# Altium PCB Плата.PcbDoc
Units mm, origin at the board's own origin, x right, y up, seen from the top; angles counter-clockwise.
Board outline 70 x 20 mm, 2 copper layers (Top Layer, Bottom Layer); 10 components, 8 nets, 86 pads, 24 vias.
Unrouted connection lines stored in the file: 8.
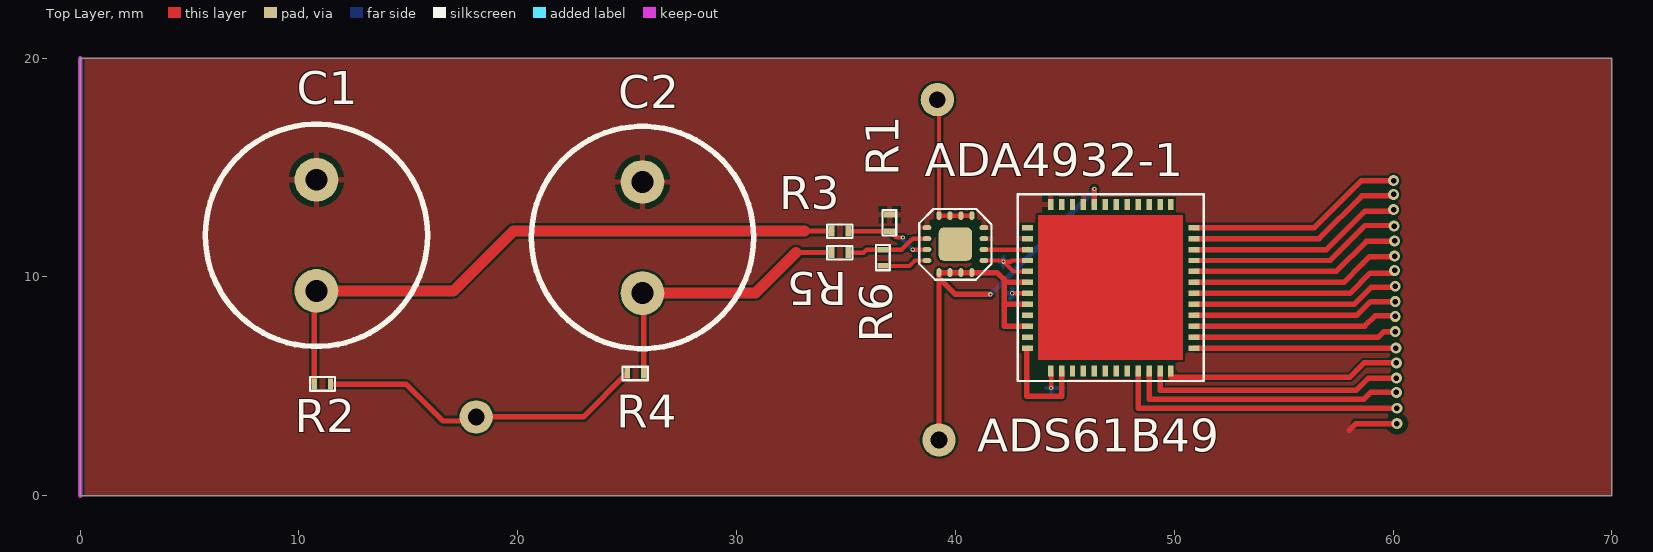
[diagram p0: Top Layer view]
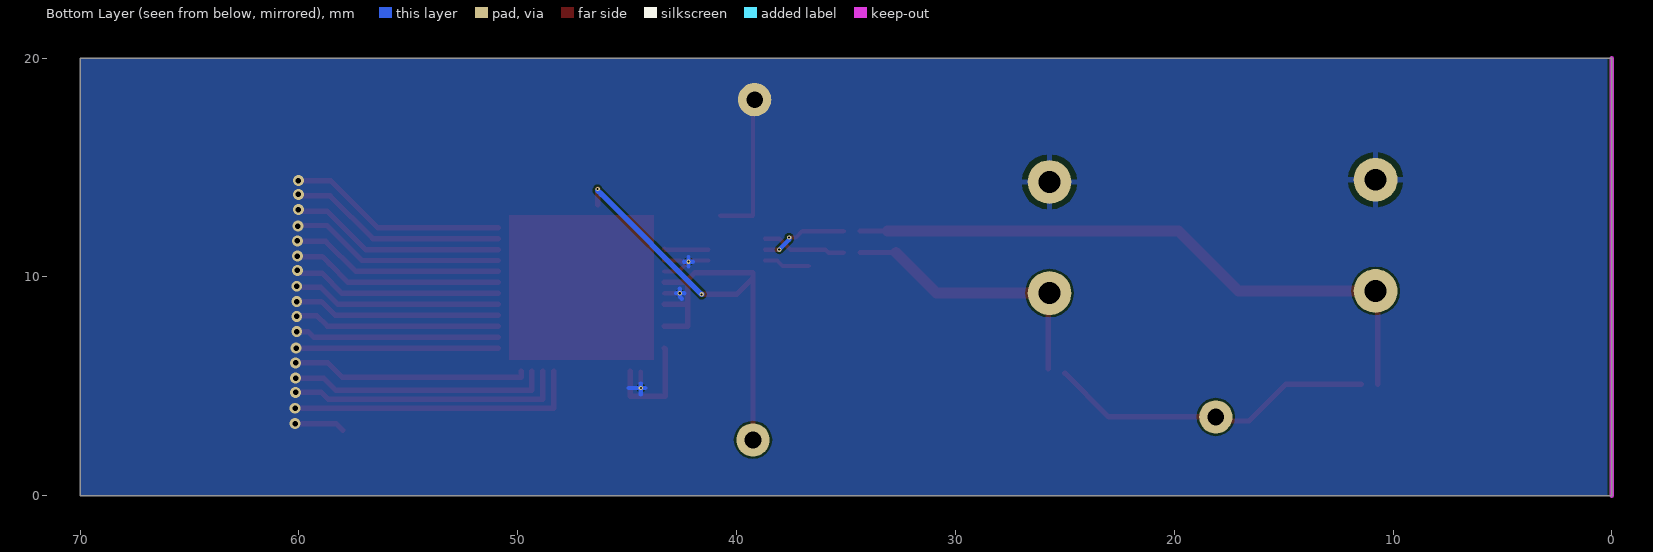
[diagram p1: Bottom Layer view, seen from below]
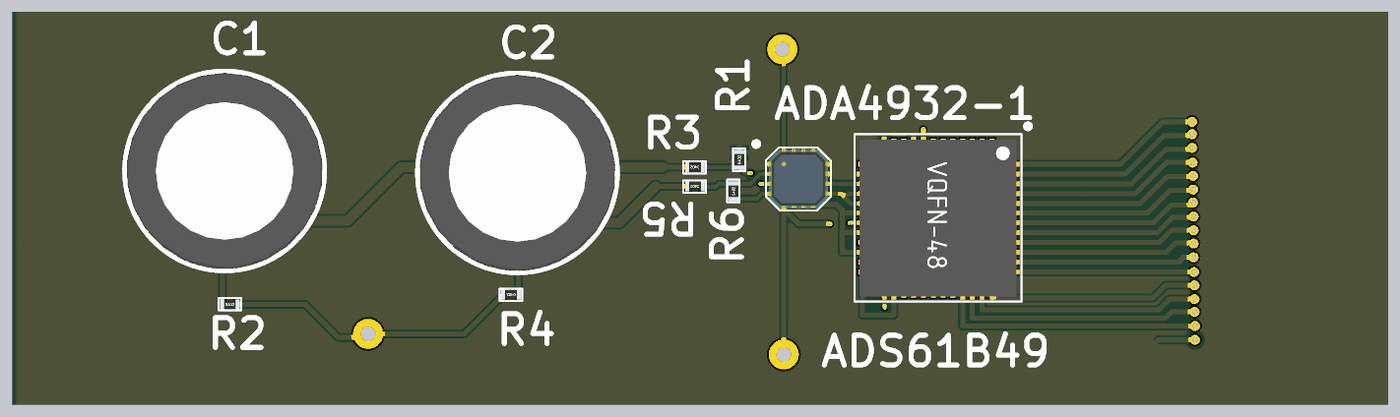
[diagram p2: 3D render of the assembled board from above, using the file's embedded part models]

## Layer stack, top to bottom
Top Solder: solder mask 0.0102, Solder Resist, Dk 3.5
Top Layer: signal copper 0.0356
Dielectric 1: dielectric 0.32, FR-4, Dk 4.8
Bottom Layer: signal copper 0.0356
Bottom Solder: solder mask 0.0102, Solder Resist, Dk 3.5

## Board outline
0,0 0,20 70,20 70,0

## Design rules (kind name [scope] priority, off if disabled: settings)
Clearance Clearance_1 [All] p1: gap=0.1 ignorepadtopadclearanceinfootprint=TRUE
Clearance [All] p2: gap=0.01 ignorepadtopadclearanceinfootprint=TRUE
PolygonConnect [All] p1: connectstyle=Relief reliefconductorwidth=0.254 reliefentries=4 polygonreliefangle="90 Angle" airgapwidth=0.254
RoutingVias [All] p1: holewidth=0.711 width=1.27 viastyle="Through Hole" minholewidth=0.711 minwidth=1.27 maxholewidth=0.711 maxwidth=1.27
ShortCircuit [All] p1: allowed=TRUE
SolderMaskExpansion [All] p1: expansion=0.102
UnRoutedNet [All] p1: checkbadconnections=TRUE
Width [All] p1: maxlimit=0.5 minlimit=0.1 preferedwidth=0.2
28 further rules are at their usual default settings.

## Components (designator, comment, footprint, x,y, rotation, side; value= is the part's Value field where it differs from the comment)
ADA4932-1 "ADA4932-1" CP-16-2 40,11.5 r180 top
ADS61B49 "ADS61B49" VQFN-48 47.1,9.5 r270 top
C1 "1uF" Capasitor10X23 10.8,11.9 r0 top
C2 "1uF" Capasitor10X23 25.7,11.8 r0 top
R1 "100k" "SMD 0402" 36.992,12.5 r90 top
R2 "1" "SMD 0402" 11.1,5.1 r0 top
R3 "100k" "SMD 0402" 34.695,12.098 r180 top
R4 "16" "SMD 0402" 25.343,5.599 r180 top
R5 "100k" "SMD 0402" 34.695,11.115 r180 top
R6 "100k" "SMD 0402" 36.698,10.905 r90 top

## Footprints (in the part's own frame and the unit in brackets; to place one, negate y for a bottom-side part, rotate by r counter-clockwise, add the part's x,y. Pads: shape width x height; smd on the part's side, far side on the other; paste and mask are expansions set on the pad)
Capasitor10X23 [mm]
  round 2 hole 1: 1(0,-2.54) 2(0,2.54)
  silkscreen extent -5.08,-5.08 5.08,5.08, body extent -5,-5 5,5, height 23
CP-16-2 [mm]
  rrect100% 0.4x0.23 smd: 1(1.3,-0.75) 2(1.3,-0.25) 3(1.3,0.25) 4(1.3,0.75) 9(-1.3,0.75) 10(-1.3,0.25) 11(-1.3,-0.25) 12(-1.3,-0.75)
  rrect100% 0.23x0.4 smd: 5(0.75,1.3) 6(0.25,1.3) 7(-0.25,1.3) 8(-0.75,1.3) 13(-0.75,-1.3) 14(-0.25,-1.3) 15(0.25,-1.3) 16(0.75,-1.3)
  rrect30% 1.524x1.524 smd: 17(0,0)
  round 0.5 on Top Overlay: 34(2.15,-1.775)
  silkscreen extent -1.65,-1.6 1.65,1.63, body extent -1.52,-1.52 1.52,1.52, height 0.9
"SMD 0402" [mm]
  rect 0.25x0.5 smd: 1(0.343,-0.001) 2(-0.405,-0.002)
  silkscreen extent -0.6,-0.3 0.55,0.33, body extent -0.53,-0.25 0.47,0.25, height 0.35
VQFN-48 [mm]
  rect 0.5x0.25 smd: 1(-3.8,2.75) 2(-3.8,2.25) 3(-3.8,1.75) 4(-3.8,1.25) 5(-3.8,0.75) 6(-3.8,0.25) 7(-3.8,-0.25) 8(-3.8,-0.75) 9(-3.8,-1.25) 10(-3.8,-1.75) 11(-3.8,-2.25) 12(-3.8,-2.75) 25(3.8,-2.75) 26(3.8,-2.25) 27(3.8,-1.75) 28(3.8,-1.25) 29(3.8,-0.75) 30(3.8,-0.25) 31(3.8,0.25) 32(3.8,0.75) 33(3.8,1.25) 34(3.8,1.75) 35(3.8,2.25) 36(3.8,2.75)
  rect 0.25x0.5 smd: 13(-2.75,-3.8) 14(-2.25,-3.8) 15(-1.75,-3.8) 16(-1.25,-3.8) 17(-0.75,-3.8) 18(-0.25,-3.8) 19(0.25,-3.8) 20(0.75,-3.8) 21(1.25,-3.8) 22(1.75,-3.8) 23(2.25,-3.8) 24(2.75,-3.8) 37(2.75,3.8) 38(2.25,3.8) 39(1.75,3.8) 40(1.25,3.8) 41(0.75,3.8) 42(0.25,3.8) 43(-0.25,3.8) 44(-0.75,3.8) 45(-1.25,3.8) 46(-1.75,3.8) 47(-2.25,3.8) 48(-2.75,3.8)
  round 0.5 on Top Overlay: 32(-4.675,4.575)
  Top Layer region: -3.324,-3.325 3.301,-3.325 3.301,3.3 -3.324,3.3
  silkscreen extent -4.28,-4.25 4.25,4.25, body extent -4.05,-4.05 4.05,4.05, height 0.8

## Part data
C1 C2: library part Capasitor
R1 R2 R3 R4 R5 R6: library part Resistor

## Free pads (board coordinates)
  round 1.524 hole 0.762: 2(39.175,18.1) 2(39.25,2.55) 3(18.1,3.6)

## Via types
v1: diameter 0.5, hole 0.25, Top Layer to Bottom Layer, 17 vias
v2: diameter 0.2, hole 0.1, Top Layer to Bottom Layer, 7 vias

## Nets (pads, with @x,y where several pads share a name; then routed paths per layer and width w, separated by ;. In a path a pad name is that pad's centre, name@x,y a point inside that pad or via, vN(x,y) a via of type N, cw(c..) or ccw(c..) an arc to the next point about the centre after c; other vN are vias at no path point)
GND: ADA4932-1.1 ADA4932-1.9 ADA4932-1.11 ADA4932-1.12 ADS61B49.9 ADS61B49.12 ADS61B49.14 ADS61B49.16 ADS61B49.17 ADS61B49.19 ADS61B49.25 C1.2 C2.2 R1.1 | length 1.2
  Top Layer w0.2: ADA4932-1.9 41.8,10.75 ; 42.574,10.75 ADS61B49.16
  other v1: 60.175,3.3
NetADA4932-1_2: ADA4932-1.2 R5.2 R6.1 | length 3.9
  Top Layer w0.2: R5.2 35.117,11.1 35.8,11.1 35.948,11.248 R6.1 37.548,11.248 38.05,11.75 ADA4932-1.2
NetADA4932-1_3: ADA4932-1.3 R1.2 R3.2 | length 4
  Top Layer w0.2: R3.2 35.105,12.095 R1.2 37.289,11.8 v2(37.6,11.8) ; v2(38.05,11.25) ADA4932-1.3
  Bottom Layer w0.2: v2(37.6,11.8) 37.6,11.7 v2(38.05,11.25)
NetADA4932-1_4: ADA4932-1.4 R6.2 | length 2.1
  Top Layer w0.2: R6.2 37.9,10.5 38.15,10.75 ADA4932-1.4
NetADA4932-1_10: ADA4932-1.10 ADS61B49.15 | length 2
  Top Layer w0.2: ADA4932-1.10 43.25,11.25 ADS61B49.15@43.3,11.3
NetC1_1: C1.1 R2.2 R3.1 | length 29
  Top Layer w0.25: R2.2 10.695,9.255 C1.1 ; 33.101,12.099 R3.1
  Top Layer w0.5: C1.1 17.06,9.36 19.799,12.099 33.101,12.099
NetC2_1: C2.1 R4.2 R5.1 | length 12.9
  Top Layer w0.25: C2.1 25.752,9.208 R4.2@25.752,5.799 ; 32.716,11.116 R5.1
  Top Layer w0.5: C2.1 30.86,9.26 32.716,11.116
VCC: ADA4932-1.5 ADA4932-1.6 ADA4932-1.7 ADA4932-1.8 ADS61B49.8 ADS61B49.18 ADS61B49.20 ADS61B49.22 ADS61B49.23 ADS61B49.24 ADS61B49.26 | length 14.2
  Top Layer w0.25: ADA4932-1.5 ADA4932-1.6 ADA4932-1.7 ADA4932-1.8 41.9,10.2 42.2,9.9 42.225,9.925 42.225,9.75 ; ADS61B49.24 43.25,6.7 43.25,4.55 44.85,4.55 ADS61B49.26 ; ADS61B49.22 42.225,7.75 42.225,8.75 ; ADS61B49.20 42.225,8.75 ; ADS61B49.18 42.225,9.75 ; ADS61B49.8 v2(46.35,14.018) ; 42.225,8.75 42.225,9.75
pads on no net: ADA4932-1.13 ADA4932-1.14 ADA4932-1.15 ADA4932-1.16 ADA4932-1.17 ADA4932-1.34 ADS61B49.1 ADS61B49.2 ADS61B49.3 ADS61B49.4 ADS61B49.5 ADS61B49.6 ADS61B49.7 ADS61B49.10 ADS61B49.11 ADS61B49.13 ADS61B49.21 ADS61B49.27 ADS61B49.28 ADS61B49.29 ADS61B49.30 ADS61B49.31 ADS61B49.32 ADS61B49.33 ADS61B49.34 ADS61B49.35 ADS61B49.36 ADS61B49.37 ADS61B49.38 ADS61B49.39 ADS61B49.40 ADS61B49.41 ADS61B49.42 ADS61B49.43 ADS61B49.44 ADS61B49.45 ADS61B49.46 ADS61B49.47 ADS61B49.48 R2.1 R4.1
copper on no net: | length 211.6
  Top Layer w0.2: 39.25,17.113 39.25,17.088 ; 39.25,18.025 39.25,17.088 ; 40.75,12.8 40.25,12.8 39.75,12.8 39.25,12.8 39.25,17.088 ; 41.8,10.75 v2@42.2,10.75 ; 42.524,10.7 v2(42.2,10.7) ; v2(42.6,9.25) 42.85,9.25 43.3,9.25 ; 43.3,10.25 42.65,10.25 v2(42.2,10.7) ; v2(44.375,4.925) 44.375,5.225 44.375,5.675 ; v2(42.2,10.7) v2@42.2,10.75 ; v2(42.2,10.7) v2@42.2,10.75
  Top Layer w0.25: 11.443,5.099 14.901,5.099 16.584,3.416 17.816,3.416 ; 18.3,3.6 23,3.6 25,5.6 ; 39.25,2.55 39.25,9.95 ; 39.25,10.2 39.25,9.95 ; v2(41.6,9.2) 40,9.2 39.335,9.865 39.25,9.95 ; 48.35,5.7 48.35,4 59.3,4 v1(60.175,4) ; 48.85,5.7 48.85,4.4 58.65,4.4 58.975,4.725 v1(60.15,4.725) ; 49.35,5.7 49.35,5.25 49.35,4.825 58.325,4.825 58.875,5.375 v1(60.15,5.375) ; 49.85,5.7 49.85,5.425 58.025,5.425 58.675,6.075 v1(60.15,6.075) ; 50.9,6.75 59.425,6.75 v1(60.125,6.75) ; 50.9,7.25 59.325,7.25 59.575,7.5 v1@60.175,7.5 ; 50.9,7.75 58.7,7.75 59.175,8.225 v1@59.875,8.225 ; 50.9,8.25 58.35,8.25 58.975,8.875 v1@59.875,8.875 ; 50.9,8.75 58.225,8.75 59,9.525 59.54,9.525 v1@59.875,9.525 ; 50.9,9.25 58.025,9.25 58.95,10.175 59.515,10.175 v1@60.125,10.175 ; 50.9,9.75 57.75,9.75 58.605,10.605 58.925,10.925 59.525,10.925 v1@60.175,10.925 ; 50.9,10.25 57.4,10.25 58.775,11.625 59.54,11.625 v1@60.175,11.625 ; 50.9,10.75 57.125,10.75 58.725,12.35 59.49,12.35 v1@60.125,12.35 ; 50.9,11.25 56.95,11.25 58.7,13 59.465,13 v1@60.125,13 ; 50.9,11.75 56.625,11.75 58.575,13.7 59.515,13.7 v1@60.125,13.7 ; 50.9,12.25 56.4,12.25 58.55,14.4 59.515,14.4 v1(60.025,14.4) ; 58,3 58.3,3.3 60.175,3.3
  Bottom Layer w0.2: 41.996,10.7 v2(42.2,10.7) ; 42.2,10.496 v2(42.2,10.7) ; 42.2,10.904 v2(42.2,10.7) ; 42.396,9.25 v2(42.6,9.25) ; 42.404,10.7 v2(42.2,10.7) ; 42.5,9 42.6,9.1 v2(42.6,9.25) ; 42.6,9.454 v2(42.6,9.25) ; 42.75,9.25 v2(42.6,9.25) ; 44.171,4.925 v2(44.375,4.925) ; 44.375,4.625 v2(44.375,4.925) ; 44.375,5.129 v2(44.375,4.925) ; 44.925,4.925 v2(44.375,4.925)
  Bottom Layer w0.25: v2(41.6,9.2) 46.184,13.784 46.35,13.95
  other v1: 60.1,7.5 60.1,8.2 60.1,8.875 60.1,9.575 60.075,10.3 60.075,10.95 60.075,11.65 60.05,12.325 60.025,13.075 60.025,13.775

## Polygon pours and split planes (outlines as drawn)
GND on Bottom Layer "Top Layer GND" (solid, pour order 10): 70,20 0,20 0,0 70,0
GND on Top Layer "Top Layer GND" (solid, pour order 14): 70,20 0,20 0,0 70,0

## Keep-outs
Keep-Out Layer:
  lines w0.2: 0,0 0,20